# EAGLE board canSlaveV05a_nutzen (EAGLE 6.5.0), part 1 of 4
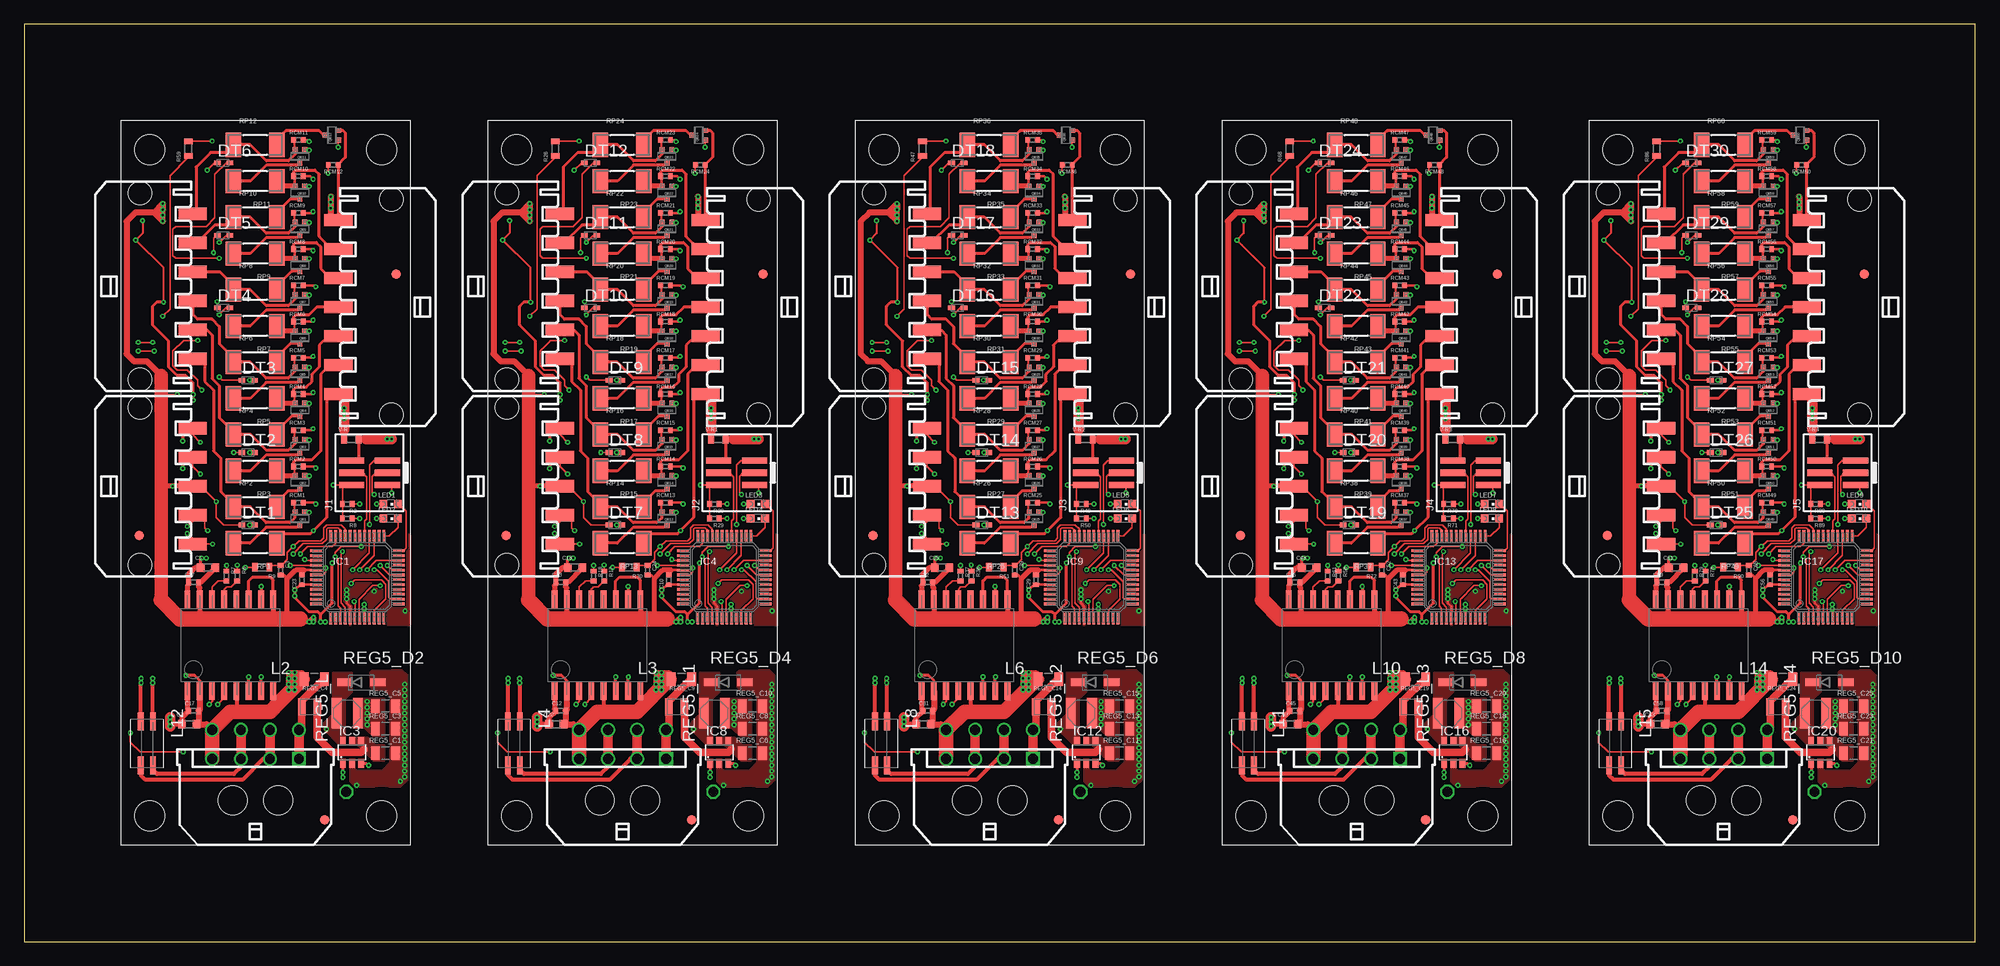
[diagram p0: board, top side]
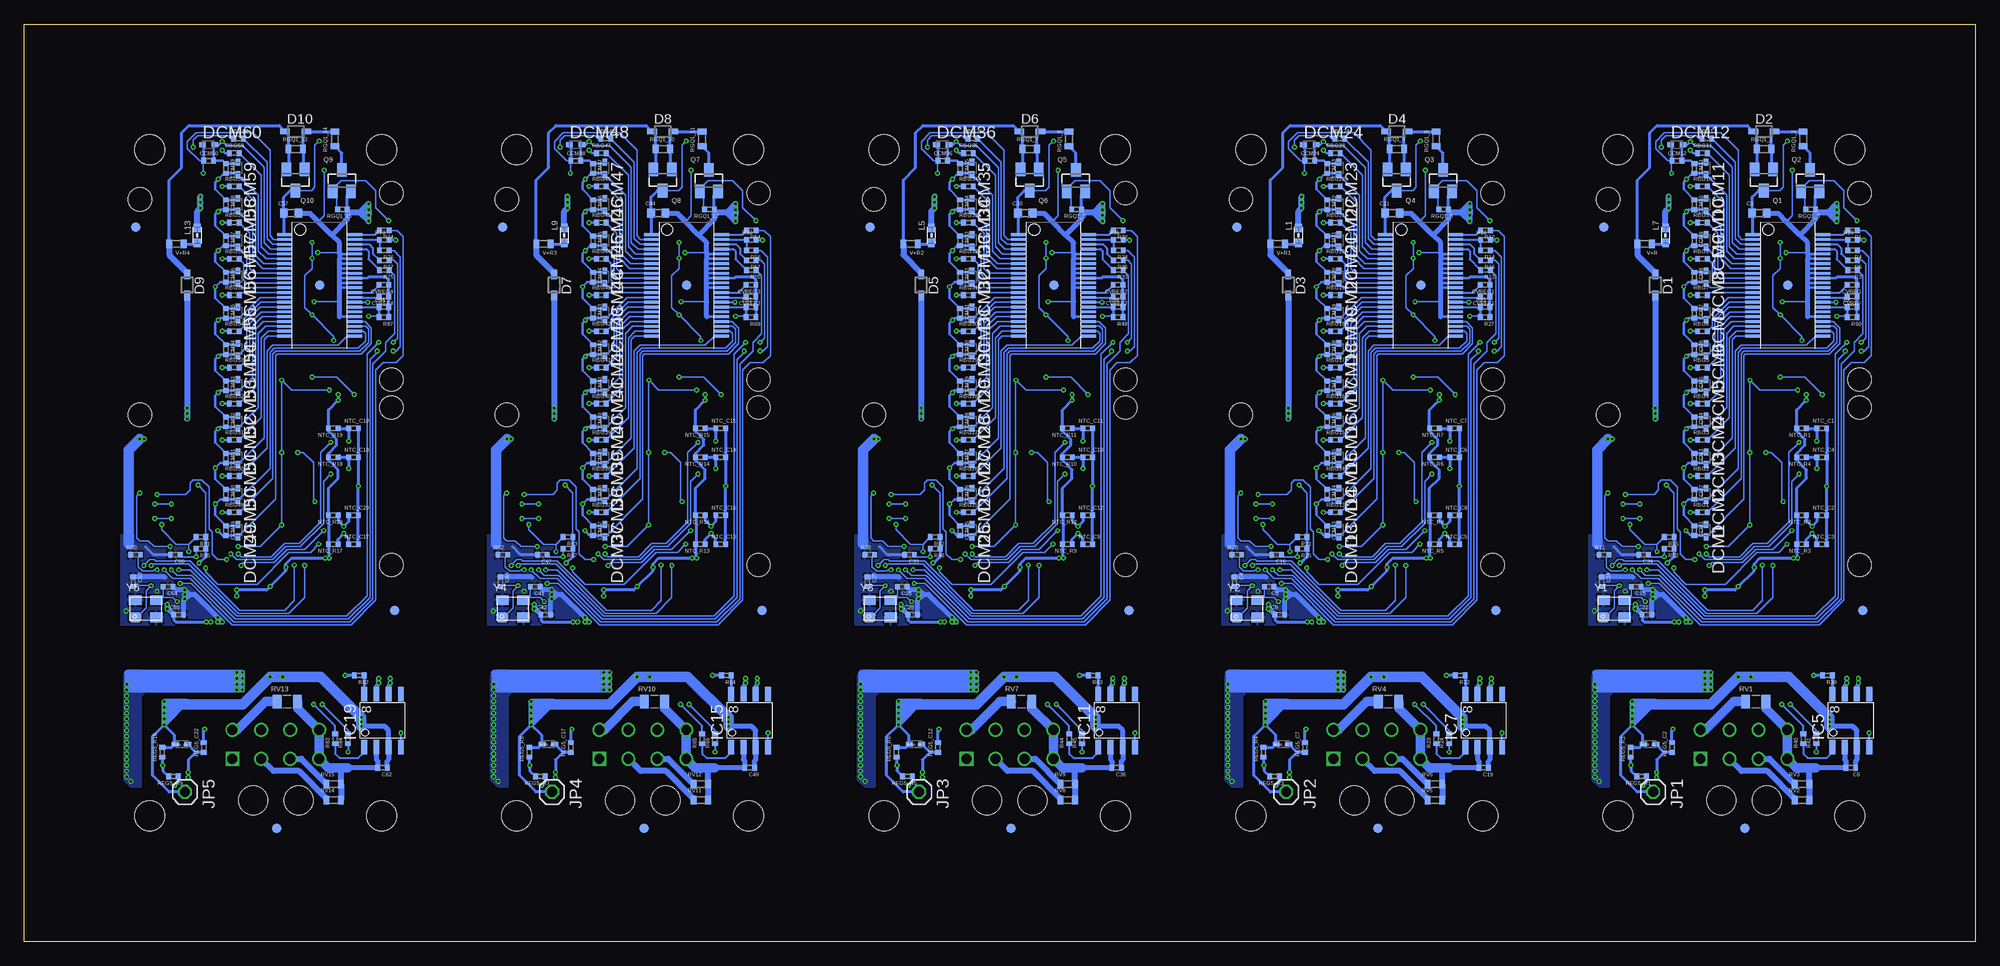
[diagram p1: board, bottom side, seen from below]

Size 202 x 95 mm. Coordinates in mm from the lower left corner, seen from the top.
Outline: 0,0 202,0 202,95 0,95 0,0
Copper layers (1*16): Top 0.035mm / dielectric 1.5mm / Bottom 0.035mm
Design rules "PCB-POOL Standard *": minimum track width 0.15mm, minimum drill 0.2mm, track to track 0.15mm, track to pad 0.15mm, pad to pad 0.15mm, via to via 0.15mm, smd to smd 0mil, copper to edge 0.3mm, drill to drill 0.2mm, minimum pad ring 0.2mm, minimum via ring 0.15mm, stop-mask expansion 0.075mm, vias tented up to drill 0.31mm, thermal gap 0.2mm
Holes 3.1 mm at 37,13 13,13 37,82 13,82 75,13 51,13 75,82 51,82 113,13 89,13 113,82 89,82 151,13 127,13 151,82 127,82 189,13 165,13 189,82 165,82
tRestrict: area 34,10 to 40,16; area 10,10 to 16,16; area 34,79 to 40,85; area 10,79 to 16,85; area 72,10 to 78,16; area 48,10 to 54,16; area 72,79 to 78,85; area 48,79 to 54,85; area 110,10 to 116,16; area 86,10 to 92,16; area 110,79 to 116,85; area 86,79 to 92,85; 8 more areas; 5 lines
bRestrict: area 34,10 to 40,16; area 10,10 to 16,16; area 34,79 to 40,85; area 10,79 to 16,85; area 72,10 to 78,16; area 48,10 to 54,16; area 72,79 to 78,85; area 48,79 to 54,85; area 110,10 to 116,16; area 86,10 to 92,16; area 110,79 to 116,85; area 86,79 to 92,85; 8 more areas; 5 lines

## Footprints (pad centres in the part's own frame; a part is rotated, then mirrored left to right if it is on the bottom)
C0603 = smd 0.8 x 0.9: 1 -0.75,0; 2 0.75,0
C0402 = smd 0.5 x 0.6: 1 -0.5,0; 2 0.5,0
SOD323-L = smd 1 x 0.6: A 1.1,0; C -1.1,0
SOD523 = smd 0.7 x 0.5: A 0.65,0; C -0.65,0
FIDUCIAL_1MM = smd 1 x 1: 1 0,0
LQFP48 = smd 0.28 x 1.2: 1 -2.75,-4.3; 2 -2.25,-4.3; 3 -1.75,-4.3; 4 -1.25,-4.3; 5 -0.75,-4.3; 6 -0.25,-4.3; 7 0.25,-4.3; 8 0.75,-4.3; 9 1.25,-4.3; 10 1.75,-4.3; 11 2.25,-4.3; 12 2.75,-4.3; 25 2.75,4.3; 26 2.25,4.3; 27 1.75,4.3; 28 1.25,4.3; 29 0.75,4.3; 30 0.25,4.3; 31 -0.25,4.3; 32 -0.75,4.3; 33 -1.25,4.3; 34 -1.75,4.3; 35 -2.25,4.3; 36 -2.75,4.3 | smd 1.2 x 0.28: 13 4.3,-2.75; 14 4.3,-2.25; 15 4.3,-1.75; 16 4.3,-1.25; 17 4.3,-0.75; 18 4.3,-0.25; 19 4.3,0.25; 20 4.3,0.75; 21 4.3,1.25; 22 4.3,1.75; 23 4.3,2.25; 24 4.3,2.75; 37 -4.3,2.75; 38 -4.3,2.25; 39 -4.3,1.75; 40 -4.3,1.25; 41 -4.3,0.75; 42 -4.3,0.25; 43 -4.3,-0.25; 44 -4.3,-0.75; 45 -4.3,-1.25; 46 -4.3,-1.75; 47 -4.3,-2.25; 48 -4.3,-2.75
44SSOP = smd 1.6 x 0.28: 1 -3.6,5.25; 2 -3.6,4.75; 3 -3.6,4.25; 4 -3.6,3.75; 5 -3.6,3.25; 6 -3.6,2.75; 7 -3.6,2.25; 8 -3.6,1.75; 9 -3.6,1.25; 10 -3.6,0.75; 11 -3.6,0.25; 12 -3.6,-0.25; 13 -3.6,-0.75; 14 -3.6,-1.25; 15 -3.6,-1.75; 16 -3.6,-2.25; 17 -3.6,-2.75; 18 -3.6,-3.25; 19 -3.6,-3.75; 20 -3.6,-4.25; 21 -3.6,-4.75; 22 -3.6,-5.25; 23 3.6,-5.25; 24 3.6,-4.75; 25 3.6,-4.25; 26 3.6,-3.75; 27 3.6,-3.25; 28 3.6,-2.75; 29 3.6,-2.25; 30 3.6,-1.75; 31 3.6,-1.25; 32 3.6,-0.75; 33 3.6,-0.25; 34 3.6,0.25; 35 3.6,0.75; 36 3.6,1.25; 37 3.6,1.75; 38 3.6,2.25; 39 3.6,2.75; 40 3.6,3.25; 41 3.6,3.75; 42 3.6,4.25; 43 3.6,4.75; 44 3.6,5.25
SOT23-6 = smd 0.6 x 0.9: 1 -0.95,-1.15; 2 0,-1.15; 3 0.95,-1.15; 4 0.95,1.15; 5 0,1.15; 6 -0.95,1.15
SO-8 = smd 1.524 x 0.61: 1 -2.743,1.905; 2 -2.743,0.635; 3 -2.743,-0.635; 4 -2.743,-1.905; 5 2.743,-1.905; 6 2.743,-0.635; 7 2.743,0.635; 8 2.743,1.905
2X03_1.27MM_SMT = smd 0.65 x 2.6: 1 -1.27,-1.85; 2 -1.27,1.85; 3 0,-1.85; 4 0,1.85; 5 1.27,-1.85; 6 1.27,1.85
1X01 = drill 1.016 octagon: 1 0,0
0603 = smd 0.85 x 0.7: 1 -0.775,0; 2 0.775,0
WE-PMI_0806 = smd 0.8 x 1.8: 1 -0.8,0; 2 0.8,0
WE-SLM = smd 1.85 x 0.6: 1 -2.28,0.63; 2 -2.28,-0.62; 3 2.27,-0.62; 4 2.27,0.63
CHIPLED_0603 = smd 0.8 x 0.8: A 0,-0.75; C 0,0.75
R0402 = smd 0.5 x 0.6: 1 -0.5,0; 2 0.5,0
SOT23 = smd 1 x 1.4: 1 -0.95,-1.1; 2 0.95,-1.1; 3 0,1.1
SOT416 = smd 0.5 x 0.6: 1 -0.5,-0.65; 2 0.5,-0.65; 3 0,0.65
R0603 = smd 0.6 x 0.9: 1 -0.75,0; 2 0.75,0
C0805 = smd 0.9 x 1.4: 1 -1.05,0; 2 1.05,0
SOD123 = smd 1.6 x 0.8: 1 -1.7,0; 2 1.7,0
WE-TPC_2828 = smd 3.2 x 1: 1 0,1.1; 2 0,-1.1
MINI_MELF-0207R = smd 1.6 x 2.5: 1 -2.25,0; 2 2.25,0
R0805 = smd 0.9 x 1.4: 1 -1.05,0; 2 1.05,0
SO16WB = smd 1.9 x 0.6: P$1 -4.7,4.445; P$2 -4.7,3.175; P$3 -4.7,1.905; P$4 -4.7,0.635; P$5 -4.7,-0.635; P$6 -4.7,-1.905; P$7 -4.7,-3.175; P$8 -4.7,-4.445; P$9 4.7,-4.445; P$10 4.7,-3.175; P$11 4.7,-1.905; P$12 4.7,-0.635; P$13 4.7,0.635; P$14 4.7,1.905; P$15 4.7,3.175; P$16 4.7,4.445
43650-0509 = smd 1.27 x 2.92: 1 6,5.48; 2 3,5.48; 3 0,5.48; 4 -3,5.48; 5 -6,5.48 | hole 2.41: 8.15,0; -8.15,0
43650-0709 = smd 1.27 x 2.92: 1 9,5.48; 2 6,5.48; 3 3,5.48; 4 0,5.48; 5 -3,5.48; 6 -6,5.48; 7 -9,5.48 | hole 2.41: 11.15,0; -11.15,0
43650-0609 = smd 1.27 x 2.92: 1 7.5,5.48; 2 4.5,5.48; 3 1.5,5.48; 4 -1.5,5.48; 5 -4.5,5.48; 6 -7.5,5.48 | hole 2.41: 9.65,0; -9.65,0
43045-0800 = drill 1.02 square: 1 4.5,4.32 | drill 1.02: 2 1.5,4.32; 3 -1.5,4.32; 4 -4.5,4.32; 5 4.5,7.32; 6 1.5,7.32; 7 -1.5,7.32; 8 -4.5,7.32 | hole 3: 2.35,0; -2.35,0
MT = smd 1.3 x 1: P1 -1.1,-0.9; P2 1.1,-0.9; P3 1.1,0.9; P4 -1.1,0.9

## Placement (x,y rotation side)
C1  100n,100V  [C0603]  22.36,75.42 0 bottom
C2  100n  [C0402]  12.75,65.7 0 bottom
C3  100n  [C0402]  26.55,38.45 270 top
C4  10p  [C0402]  76.7,37.25 270 bottom
C5  10u  [C0603]  19.02,38.73 0 top
C6  100n  [C0402]  12.9,18 180 bottom
C7  10u  [C0603]  17.1,22.5 0 top
C8  10p  [C0402]  73.1,36.75 180 bottom
C9  100n  [C0402]  72,33.85 0 bottom
C10  100n  [C0402]  66.75,37.45 90 top
C11  100n,100V  [C0603]  60.36,75.42 0 bottom
C12  100n  [C0402]  55.55,23.9 0 top
C13  100n  [C0402]  55.55,37.2 0 top
C14  10p  [C0402]  38.7,37.25 270 bottom
C15  10p  [C0402]  35.1,36.75 180 bottom
C16  100n  [C0402]  72.35,40.05 180 bottom
C17  100n  [C0402]  17.55,23.9 0 top
C18  10u  [C0603]  57.02,38.73 0 top
C19  100n  [C0402]  50.9,18 180 bottom
C20  10u  [C0603]  55.1,22.5 0 top
C21  100n  [C0402]  50.75,65.7 0 bottom
C22  100n  [C0402]  34,33.85 0 bottom
C23  100n  [C0402]  28.75,37.45 90 top
C24  100n  [C0402]  64.55,38.45 270 top
C25  10p  [C0402]  114.7,37.25 270 bottom
C26  10p  [C0402]  111.1,36.75 180 bottom
C27  100n  [C0402]  17.55,37.2 0 top
C28  100n  [C0402]  110,33.85 0 bottom
C29  100n  [C0402]  104.75,37.45 90 top
C30  100n,100V  [C0603]  98.36,75.42 0 bottom
C31  100n  [C0402]  93.55,23.9 0 top
C32  100n  [C0402]  93.55,37.2 0 top
C33  100n  [C0402]  110.35,40.05 180 bottom
C34  100n  [C0402]  34.35,40.05 180 bottom
C35  10u  [C0603]  95.03,38.73 0 top
C36  100n  [C0402]  88.9,18 180 bottom
C37  10u  [C0603]  93.1,22.5 0 top
C38  100n  [C0402]  88.75,65.7 0 bottom
C39  100n  [C0402]  102.55,38.45 270 top
C40  10p  [C0402]  152.7,37.25 270 bottom
C41  10p  [C0402]  149.1,36.75 180 bottom
C42  100n  [C0402]  148,33.85 0 bottom
C43  100n  [C0402]  142.75,37.45 90 top
C44  100n,100V  [C0603]  136.36,75.42 0 bottom
C45  100n  [C0402]  131.55,23.9 0 top
C46  100n  [C0402]  131.55,37.2 0 top
C47  100n  [C0402]  148.35,40.05 180 bottom
C48  10u  [C0603]  133.03,38.73 0 top
C49  100n  [C0402]  126.9,18 180 bottom
C50  10u  [C0603]  131.1,22.5 0 top
C51  100n  [C0402]  126.75,65.7 0 bottom
C52  100n  [C0402]  140.55,38.45 270 top
C53  10p  [C0402]  190.7,37.25 270 bottom
C54  10p  [C0402]  187.1,36.75 180 bottom
C55  100n  [C0402]  186,33.85 0 bottom
C56  100n  [C0402]  180.75,37.45 90 top
C57  100n,100V  [C0603]  174.36,75.42 0 bottom
C58  100n  [C0402]  169.55,23.9 0 top
C59  100n  [C0402]  169.55,37.2 0 top
C60  100n  [C0402]  186.35,40.05 180 bottom
C61  10u  [C0603]  171.03,38.73 0 top
C62  100n  [C0402]  164.9,18 180 bottom
C63  10u  [C0603]  169.1,22.5 0 top
C64  100n  [C0402]  164.75,65.7 0 bottom
C65  100n  [C0402]  178.55,38.45 270 top
CCM1  100n  [C0402]  29.1,42.55 270 bottom
CCM2  100n  [C0402]  29.1,46.3 270 bottom
CCM3  100n  [C0402]  29.1,50.05 270 bottom
CCM4  100n  [C0402]  29.1,53.8 270 bottom
CCM5  100n  [C0402]  29.1,57.55 270 bottom
CCM6  100n  [C0402]  29.1,61.3 270 bottom
CCM7  100n  [C0402]  29.1,65.05 270 bottom
CCM8  100n  [C0402]  29.1,68.8 270 bottom
CCM9  100n  [C0402]  29.1,72.55 270 bottom
CCM10  100n  [C0402]  29.1,76.3 270 bottom
CCM11  100n  [C0402]  29.1,80.05 270 bottom
CCM12  100n  [C0402]  30.9,80.85 0 bottom
CCM13  100n  [C0402]  67.1,42.55 270 bottom
CCM14  100n  [C0402]  67.1,46.3 270 bottom
CCM15  100n  [C0402]  67.1,50.05 270 bottom
CCM16  100n  [C0402]  67.1,53.8 270 bottom
CCM17  100n  [C0402]  67.1,57.55 270 bottom
CCM18  100n  [C0402]  67.1,61.3 270 bottom
CCM19  100n  [C0402]  67.1,65.05 270 bottom
CCM20  100n  [C0402]  67.1,68.8 270 bottom
CCM21  100n  [C0402]  67.1,72.55 270 bottom
CCM22  100n  [C0402]  67.1,76.3 270 bottom
CCM23  100n  [C0402]  67.1,80.05 270 bottom
CCM24  100n  [C0402]  68.9,80.85 0 bottom
CCM25  100n  [C0402]  105.1,42.55 270 bottom
CCM26  100n  [C0402]  105.1,46.3 270 bottom
CCM27  100n  [C0402]  105.1,50.05 270 bottom
CCM28  100n  [C0402]  105.1,53.8 270 bottom
CCM29  100n  [C0402]  105.1,57.55 270 bottom
CCM30  100n  [C0402]  105.1,61.3 270 bottom
CCM31  100n  [C0402]  105.1,65.05 270 bottom
CCM32  100n  [C0402]  105.1,68.8 270 bottom
CCM33  100n  [C0402]  105.1,72.55 270 bottom
CCM34  100n  [C0402]  105.1,76.3 270 bottom
CCM35  100n  [C0402]  105.1,80.05 270 bottom
CCM36  100n  [C0402]  106.9,80.85 0 bottom
CCM37  100n  [C0402]  143.1,42.55 270 bottom
CCM38  100n  [C0402]  143.1,46.3 270 bottom
CCM39  100n  [C0402]  143.1,50.05 270 bottom
CCM40  100n  [C0402]  143.1,53.8 270 bottom
CCM41  100n  [C0402]  143.1,57.55 270 bottom
CCM42  100n  [C0402]  143.1,61.3 270 bottom
CCM43  100n  [C0402]  143.1,65.05 270 bottom
CCM44  100n  [C0402]  143.1,68.8 270 bottom
CCM45  100n  [C0402]  143.1,72.55 270 bottom
CCM46  100n  [C0402]  143.1,76.3 270 bottom
CCM47  100n  [C0402]  143.1,80.05 270 bottom
CCM48  100n  [C0402]  144.9,80.85 0 bottom
CCM49  100n  [C0402]  181.1,42.55 270 bottom
CCM50  100n  [C0402]  181.1,46.3 270 bottom
CCM51  100n  [C0402]  181.1,50.05 270 bottom
CCM52  100n  [C0402]  181.1,53.8 270 bottom
CCM53  100n  [C0402]  181.1,57.55 270 bottom
CCM54  100n  [C0402]  181.1,61.3 270 bottom
CCM55  100n  [C0402]  181.1,65.05 270 bottom
CCM56  100n  [C0402]  181.1,68.8 270 bottom
CCM57  100n  [C0402]  181.1,72.55 270 bottom
CCM58  100n  [C0402]  181.1,76.3 270 bottom
CCM59  100n  [C0402]  181.1,80.05 270 bottom
CCM60  100n  [C0402]  182.9,80.85 0 bottom
CVREF  1u  [C0402]  12.75,66.8 180 bottom
CVREF1  1u  [C0402]  50.75,66.8 180 bottom
CVREF2  1u  [C0402]  88.75,66.8 180 bottom
CVREF3  1u  [C0402]  126.75,66.8 180 bottom
CVREF4  1u  [C0402]  164.75,66.8 180 bottom
CVREG  1u  [C0402]  12.75,68 180 bottom
CVREG1  1u  [C0402]  50.75,68 180 bottom
CVREG2  1u  [C0402]  88.75,68 180 bottom
CVREG3  1u  [C0402]  126.75,68 180 bottom
CVREG4  1u  [C0402]  164.75,68 180 bottom
D1  51V  [SOD323-L]  33.13,67.99 270 bottom
D2  12V  [SOD323-L]  21.89,83.89 0 bottom
D3  51V  [SOD323-L]  71.13,67.99 270 bottom
D4  12V  [SOD323-L]  59.89,83.89 0 bottom
D5  51V  [SOD323-L]  109.13,67.99 270 bottom
D6  12V  [SOD323-L]  97.89,83.89 0 bottom
D7  51V  [SOD323-L]  147.13,67.99 270 bottom
D8  12V  [SOD323-L]  135.89,83.89 0 bottom
D9  51V  [SOD323-L]  185.13,67.99 270 bottom
D10  12V  [SOD323-L]  173.89,83.89 0 bottom
DCM1  7.5  [SOD523]  27.88,42.55 270 bottom
DCM2  7.5  [SOD523]  27.88,46.3 270 bottom
DCM3  7.5  [SOD523]  27.88,50.05 270 bottom
DCM4  7.5  [SOD523]  27.88,53.8 270 bottom
DCM5  7.5  [SOD523]  27.88,57.55 270 bottom
DCM6  7.5  [SOD523]  27.88,61.3 270 bottom
DCM7  7.5  [SOD523]  27.88,65.05 270 bottom
DCM8  7.5  [SOD523]  27.88,68.8 270 bottom
DCM9  7.5  [SOD523]  27.88,72.55 270 bottom
DCM10  7.5  [SOD523]  27.88,76.3 270 bottom
DCM11  7.5  [SOD523]  27.88,80.05 270 bottom
DCM12  7.5  [SOD523]  30.9,82.53 0 bottom
DCM13  7.5  [SOD523]  65.88,42.55 270 bottom
DCM14  7.5  [SOD523]  65.88,46.3 270 bottom
DCM15  7.5  [SOD523]  65.88,50.05 270 bottom
DCM16  7.5  [SOD523]  65.88,53.8 270 bottom
DCM17  7.5  [SOD523]  65.88,57.55 270 bottom
DCM18  7.5  [SOD523]  65.88,61.3 270 bottom
DCM19  7.5  [SOD523]  65.88,65.05 270 bottom
DCM20  7.5  [SOD523]  65.88,68.8 270 bottom
DCM21  7.5  [SOD523]  65.88,72.55 270 bottom
DCM22  7.5  [SOD523]  65.88,76.3 270 bottom
DCM23  7.5  [SOD523]  65.88,80.05 270 bottom
DCM24  7.5  [SOD523]  68.9,82.53 0 bottom
DCM25  7.5  [SOD523]  103.88,42.55 270 bottom
DCM26  7.5  [SOD523]  103.88,46.3 270 bottom
DCM27  7.5  [SOD523]  103.88,50.05 270 bottom
DCM28  7.5  [SOD523]  103.88,53.8 270 bottom
DCM29  7.5  [SOD523]  103.88,57.55 270 bottom
DCM30  7.5  [SOD523]  103.88,61.3 270 bottom
DCM31  7.5  [SOD523]  103.88,65.05 270 bottom
DCM32  7.5  [SOD523]  103.88,68.8 270 bottom
DCM33  7.5  [SOD523]  103.88,72.55 270 bottom
DCM34  7.5  [SOD523]  103.88,76.3 270 bottom
DCM35  7.5  [SOD523]  103.88,80.05 270 bottom
DCM36  7.5  [SOD523]  106.9,82.53 0 bottom
DCM37  7.5  [SOD523]  141.88,42.55 270 bottom
DCM38  7.5  [SOD523]  141.88,46.3 270 bottom
DCM39  7.5  [SOD523]  141.88,50.05 270 bottom
DCM40  7.5  [SOD523]  141.88,53.8 270 bottom
DCM41  7.5  [SOD523]  141.88,57.55 270 bottom
DCM42  7.5  [SOD523]  141.88,61.3 270 bottom
DCM43  7.5  [SOD523]  141.88,65.05 270 bottom
DCM44  7.5  [SOD523]  141.88,68.8 270 bottom
DCM45  7.5  [SOD523]  141.88,72.55 270 bottom
DCM46  7.5  [SOD523]  141.88,76.3 270 bottom
DCM47  7.5  [SOD523]  141.88,80.05 270 bottom
DCM48  7.5  [SOD523]  144.9,82.53 0 bottom
DCM49  7.5  [SOD523]  179.88,42.55 270 bottom
DCM50  7.5  [SOD523]  179.88,46.3 270 bottom
DCM51  7.5  [SOD523]  179.88,50.05 270 bottom
DCM52  7.5  [SOD523]  179.88,53.8 270 bottom
DCM53  7.5  [SOD523]  179.88,57.55 270 bottom
DCM54  7.5  [SOD523]  179.88,61.3 270 bottom
DCM55  7.5  [SOD523]  179.88,65.05 270 bottom
DCM56  7.5  [SOD523]  179.88,68.8 270 bottom
DCM57  7.5  [SOD523]  179.88,72.55 270 bottom
DCM58  7.5  [SOD523]  179.88,76.3 270 bottom
DCM59  7.5  [SOD523]  179.88,80.05 270 bottom
DCM60  7.5  [SOD523]  182.9,82.53 0 bottom
DT1  1PS79SB40  [SOD523]  23.2,43.12 0 top
DT2  1PS79SB40  [SOD523]  23.2,50.65 0 top
DT3  1PS79SB40  [SOD523]  23.2,58.12 0 top
DT4  1PS79SB40  [SOD523]  20.65,65.62 0 top
DT5  1PS79SB40  [SOD523]  20.65,73.12 0 top
DT6  1PS79SB40  [SOD523]  20.65,80.62 0 top
DT7  1PS79SB40  [SOD523]  61.2,43.12 0 top
DT8  1PS79SB40  [SOD523]  61.2,50.65 0 top
DT9  1PS79SB40  [SOD523]  61.2,58.12 0 top
DT10  1PS79SB40  [SOD523]  58.65,65.62 0 top
DT11  1PS79SB40  [SOD523]  58.65,73.12 0 top
DT12  1PS79SB40  [SOD523]  58.65,80.62 0 top
DT13  1PS79SB40  [SOD523]  99.2,43.12 0 top
DT14  1PS79SB40  [SOD523]  99.2,50.65 0 top
DT15  1PS79SB40  [SOD523]  99.2,58.12 0 top
DT16  1PS79SB40  [SOD523]  96.65,65.62 0 top
DT17  1PS79SB40  [SOD523]  96.65,73.12 0 top
DT18  1PS79SB40  [SOD523]  96.65,80.62 0 top
DT19  1PS79SB40  [SOD523]  137.2,43.12 0 top
DT20  1PS79SB40  [SOD523]  137.2,50.65 0 top
DT21  1PS79SB40  [SOD523]  137.2,58.12 0 top
DT22  1PS79SB40  [SOD523]  134.65,65.62 0 top
DT23  1PS79SB40  [SOD523]  134.65,73.12 0 top
DT24  1PS79SB40  [SOD523]  134.65,80.62 0 top
DT25  1PS79SB40  [SOD523]  175.2,43.12 0 top
DT26  1PS79SB40  [SOD523]  175.2,50.65 0 top
DT27  1PS79SB40  [SOD523]  175.2,58.12 0 top
DT28  1PS79SB40  [SOD523]  172.65,65.62 0 top
DT29  1PS79SB40  [SOD523]  172.65,73.12 0 top
DT30  1PS79SB40  [SOD523]  172.65,80.62 0 top
FID1  FIDUCIAL""  [FIDUCIAL_1MM]  69.09,12.58 90 top
FID2  FIDUCIAL""  [FIDUCIAL_1MM]  31.09,12.58 90 top
FID3  FIDUCIAL""  [FIDUCIAL_1MM]  38.52,69.12 90 top
FID4  FIDUCIAL""  [FIDUCIAL_1MM]  11.9,42.05 90 top
FID5  FIDUCIAL""  [FIDUCIAL_1MM]  76.52,69.12 90 top
FID6  FIDUCIAL""  [FIDUCIAL_1MM]  49.63,34.28 270 bottom
FID7  FIDUCIAL""  [FIDUCIAL_1MM]  11.63,34.28 270 bottom
FID8  FIDUCIAL""  [FIDUCIAL_1MM]  23.84,11.72 270 bottom
FID9  FIDUCIAL""  [FIDUCIAL_1MM]  19.4,68 270 bottom
FID10  FIDUCIAL""  [FIDUCIAL_1MM]  38.45,74 270 bottom
FID11  FIDUCIAL""  [FIDUCIAL_1MM]  61.84,11.72 270 bottom
FID12  FIDUCIAL""  [FIDUCIAL_1MM]  49.9,42.05 90 top
FID13  FIDUCIAL""  [FIDUCIAL_1MM]  57.4,68 270 bottom
FID14  FIDUCIAL""  [FIDUCIAL_1MM]  76.45,74 270 bottom
FID15  FIDUCIAL""  [FIDUCIAL_1MM]  107.09,12.58 90 top
FID16  FIDUCIAL""  [FIDUCIAL_1MM]  114.52,69.12 90 top
FID17  FIDUCIAL""  [FIDUCIAL_1MM]  87.63,34.28 270 bottom
FID18  FIDUCIAL""  [FIDUCIAL_1MM]  99.84,11.72 270 bottom
FID19  FIDUCIAL""  [FIDUCIAL_1MM]  87.9,42.05 90 top
FID20  FIDUCIAL""  [FIDUCIAL_1MM]  95.4,68 270 bottom
FID21  FIDUCIAL""  [FIDUCIAL_1MM]  114.45,74 270 bottom
FID22  FIDUCIAL""  [FIDUCIAL_1MM]  145.09,12.58 90 top
FID23  FIDUCIAL""  [FIDUCIAL_1MM]  152.51,69.12 90 top
FID24  FIDUCIAL""  [FIDUCIAL_1MM]  125.63,34.28 270 bottom
FID25  FIDUCIAL""  [FIDUCIAL_1MM]  137.84,11.72 270 bottom
FID26  FIDUCIAL""  [FIDUCIAL_1MM]  125.9,42.05 90 top
FID27  FIDUCIAL""  [FIDUCIAL_1MM]  133.4,68 270 bottom
FID28  FIDUCIAL""  [FIDUCIAL_1MM]  152.45,74 270 bottom
FID29  FIDUCIAL""  [FIDUCIAL_1MM]  183.09,12.58 90 top
FID30  FIDUCIAL""  [FIDUCIAL_1MM]  190.51,69.12 90 top
FID31  FIDUCIAL""  [FIDUCIAL_1MM]  163.63,34.28 270 bottom
FID32  FIDUCIAL""  [FIDUCIAL_1MM]  175.84,11.72 270 bottom
FID33  FIDUCIAL""  [FIDUCIAL_1MM]  163.9,42.05 90 top
FID34  FIDUCIAL""  [FIDUCIAL_1MM]  171.4,68 270 bottom
FID35  FIDUCIAL""  [FIDUCIAL_1MM]  190.45,74 270 bottom
IC1  LPC11C14  [LQFP48]  34.49,37.71 0 top
IC2  LTC6803-4  [44SSOP]  19.43,67.96 0 bottom
IC3  LT1616  [SOT23-6]  33.95,19.6 0 top
IC4  LPC11C14  [LQFP48]  72.49,37.71 0 top
IC5  PCA82C251  [SO-8]  12.9,22.89 90 bottom
IC6  LTC6803-4  [44SSOP]  57.43,67.96 0 bottom
IC7  PCA82C251  [SO-8]  50.9,22.89 90 bottom
IC8  LT1616  [SOT23-6]  71.95,19.6 0 top
IC9  LPC11C14  [LQFP48]  110.49,37.71 0 top
IC10  LTC6803-4  [44SSOP]  95.43,67.96 0 bottom
IC11  PCA82C251  [SO-8]  88.9,22.89 90 bottom
IC12  LT1616  [SOT23-6]  109.95,19.6 0 top
IC13  LPC11C14  [LQFP48]  148.49,37.71 0 top
IC14  LTC6803-4  [44SSOP]  133.43,67.96 0 bottom
IC15  PCA82C251  [SO-8]  126.9,22.89 90 bottom
IC16  LT1616  [SOT23-6]  147.95,19.6 0 top
IC17  LPC11C14  [LQFP48]  186.49,37.71 0 top
IC18  LTC6803-4  [44SSOP]  171.43,67.96 0 bottom
IC19  PCA82C251  [SO-8]  164.9,22.89 90 bottom
IC20  LT1616  [SOT23-6]  185.95,19.6 0 top
J1  PINHEAD-2X031.27SMT  [2X03_1.27MM_SMT]  35.75,48.55 90 top
J2  PINHEAD-2X031.27SMT  [2X03_1.27MM_SMT]  73.75,48.55 90 top
J3  PINHEAD-2X031.27SMT  [2X03_1.27MM_SMT]  111.75,48.55 90 top
J4  PINHEAD-2X031.27SMT  [2X03_1.27MM_SMT]  149.75,48.55 90 top
J5  PINHEAD-2X031.27SMT  [2X03_1.27MM_SMT]  187.75,48.55 90 top
JP1  [1X01]  33.35,15.5 270 bottom
JP2  [1X01]  71.35,15.5 270 bottom
JP3  [1X01]  109.35,15.5 270 bottom
JP4  [1X01]  147.35,15.5 270 bottom
JP5  [1X01]  185.35,15.5 270 bottom
L1  WE-CBF,742792664  [0603]  70.08,73.13 270 bottom
L2  WE-PMI/74479776233A  [WE-PMI_0806]  29.55,24.3 0 top
L3  WE-PMI/74479776233A  [WE-PMI_0806]  67.55,24.3 0 top
L4  WE-SLM  [WE-SLM]  50.7,20.5 270 top
L5  WE-CBF,742792664  [0603]  108.08,73.13 270 bottom
L6  WE-PMI/74479776233A  [WE-PMI_0806]  105.55,24.3 0 top
L7  WE-CBF,742792664  [0603]  32.08,73.13 270 bottom
L8  WE-SLM  [WE-SLM]  88.7,20.5 270 top
L9  WE-CBF,742792664  [0603]  146.08,73.13 270 bottom
L10  WE-PMI/74479776233A  [WE-PMI_0806]  143.55,24.3 0 top
L11  WE-SLM  [WE-SLM]  126.7,20.5 270 top
L12  WE-SLM  [WE-SLM]  12.7,20.5 270 top
L13  WE-CBF,742792664  [0603]  184.08,73.13 270 bottom
L14  WE-PMI/74479776233A  [WE-PMI_0806]  181.55,24.3 0 top
L15  WE-SLM  [WE-SLM]  164.7,20.5 270 top
LED1  GRN  [CHIPLED_0603]  37.95,45.3 270 top
LED2  RED  [CHIPLED_0603]  37.95,43.8 270 top
LED3  GRN  [CHIPLED_0603]  75.95,45.3 270 top
LED4  RED  [CHIPLED_0603]  75.95,43.8 270 top
LED5  GRN  [CHIPLED_0603]  113.95,45.3 270 top
LED6  RED  [CHIPLED_0603]  113.95,43.8 270 top
LED7  GRN  [CHIPLED_0603]  151.95,45.3 270 top
LED8  RED  [CHIPLED_0603]  151.95,43.8 270 top
LED9  GRN  [CHIPLED_0603]  189.95,45.3 270 top
LED10  RED  [CHIPLED_0603]  189.95,43.8 270 top
NTC_C1  1u  [C0402]  15.9,53.15 0 bottom
NTC_C2  1u  [C0402]  15.9,44.15 0 bottom
NTC_C3  1u  [C0402]  15.9,41.15 0 bottom
NTC_C4  1u  [C0402]  15.9,50.15 0 bottom
NTC_C5  1u  [C0402]  53.9,41.15 0 bottom
NTC_C6  1u  [C0402]  53.9,50.15 0 bottom
NTC_C7  1u  [C0402]  53.9,53.15 0 bottom
NTC_C8  1u  [C0402]  53.9,44.15 0 bottom
NTC_C9  1u  [C0402]  91.9,41.15 0 bottom
NTC_C10  1u  [C0402]  91.9,50.15 0 bottom
NTC_C11  1u  [C0402]  91.9,53.15 0 bottom
NTC_C12  1u  [C0402]  91.9,44.15 0 bottom
NTC_C13  1u  [C0402]  129.9,41.15 0 bottom
NTC_C14  1u  [C0402]  129.9,50.15 0 bottom
NTC_C15  1u  [C0402]  129.9,53.15 0 bottom
NTC_C16  1u  [C0402]  129.9,44.15 0 bottom
NTC_C17  1u  [C0402]  167.9,41.15 0 bottom
NTC_C18  1u  [C0402]  167.9,50.15 0 bottom
NTC_C19  1u  [C0402]  167.9,53.15 0 bottom
NTC_C20  1u  [C0402]  167.9,44.15 0 bottom
NTC_R1  1k  [R0402]  18,53.15 180 bottom
NTC_R2  1k  [R0402]  18,44.15 180 bottom
NTC_R3  1k  [R0402]  18,41.15 180 bottom
NTC_R4  1k  [R0402]  18,50.15 180 bottom
NTC_R5  1k  [R0402]  56,41.15 180 bottom
NTC_R6  1k  [R0402]  56,50.15 180 bottom
NTC_R7  1k  [R0402]  56,53.15 180 bottom
NTC_R8  1k  [R0402]  56,44.15 180 bottom
NTC_R9  1k  [R0402]  94,41.15 180 bottom
NTC_R10  1k  [R0402]  94,50.15 180 bottom
NTC_R11  1k  [R0402]  94,53.15 180 bottom
NTC_R12  1k  [R0402]  94,44.15 180 bottom
NTC_R13  1k  [R0402]  132,41.15 180 bottom
NTC_R14  1k  [R0402]  132,50.15 180 bottom
NTC_R15  1k  [R0402]  132,53.15 180 bottom
NTC_R16  1k  [R0402]  132,44.15 180 bottom
NTC_R17  1k  [R0402]  170,41.15 180 bottom
NTC_R18  1k  [R0402]  170,50.15 180 bottom
NTC_R19  1k  [R0402]  170,53.15 180 bottom
NTC_R20  1k  [R0402]  170,44.15 180 bottom
Q1  BSS84  [SOT23]  21.9,78.86 180 bottom
Q2  2N7002  [SOT23]  17.11,78.78 0 bottom
Q3  2N7002  [SOT23]  55.11,78.78 0 bottom
Q4  BSS84  [SOT23]  59.9,78.86 180 bottom
Q5  2N7002  [SOT23]  93.11,78.78 0 bottom
Q6  BSS84  [SOT23]  97.9,78.86 180 bottom
Q7  2N7002  [SOT23]  131.11,78.78 0 bottom
Q8  BSS84  [SOT23]  135.9,78.86 180 bottom
Q9  2N7002  [SOT23]  169.11,78.78 0 bottom
Q10  BSS84  [SOT23]  173.9,78.86 180 bottom
QB1  BSS84AKT  [SOT416]  28.55,43.8 180 top
QB2  BSS84AKT  [SOT416]  28.55,47.55 180 top
QB3  BSS84AKT  [SOT416]  28.55,51.3 180 top
QB4  BSS84AKT  [SOT416]  28.55,55.05 180 top
QB5  BSS84AKT  [SOT416]  28.55,58.8 180 top
QB6  BSS84AKT  [SOT416]  28.55,62.55 180 top
QB7  BSS84AKT  [SOT416]  28.55,66.3 180 top
QB8  BSS84AKT  [SOT416]  28.55,70.05 180 top
QB9  BSS84AKT  [SOT416]  28.55,73.8 180 top
QB10  BSS84AKT  [SOT416]  28.55,77.55 180 top
QB11  BSS84AKT  [SOT416]  28.55,81.3 180 top
QB12  BSS84AKT  [SOT416]  31.85,83.5 90 top
QB13  BSS84AKT  [SOT416]  66.55,43.8 180 top
QB14  BSS84AKT  [SOT416]  66.55,47.55 180 top
QB15  BSS84AKT  [SOT416]  66.55,51.3 180 top
QB16  BSS84AKT  [SOT416]  66.55,55.05 180 top
QB17  BSS84AKT  [SOT416]  66.55,58.8 180 top
QB18  BSS84AKT  [SOT416]  66.55,62.55 180 top
QB19  BSS84AKT  [SOT416]  66.55,66.3 180 top
QB20  BSS84AKT  [SOT416]  66.55,70.05 180 top
QB21  BSS84AKT  [SOT416]  66.55,73.8 180 top
QB22  BSS84AKT  [SOT416]  66.55,77.55 180 top
QB23  BSS84AKT  [SOT416]  66.55,81.3 180 top
QB24  BSS84AKT  [SOT416]  69.85,83.5 90 top
QB25  BSS84AKT  [SOT416]  104.55,43.8 180 top
QB26  BSS84AKT  [SOT416]  104.55,47.55 180 top
QB27  BSS84AKT  [SOT416]  104.55,51.3 180 top
QB28  BSS84AKT  [SOT416]  104.55,55.05 180 top
QB29  BSS84AKT  [SOT416]  104.55,58.8 180 top
QB30  BSS84AKT  [SOT416]  104.55,62.55 180 top
QB31  BSS84AKT  [SOT416]  104.55,66.3 180 top
QB32  BSS84AKT  [SOT416]  104.55,70.05 180 top
QB33  BSS84AKT  [SOT416]  104.55,73.8 180 top
QB34  BSS84AKT  [SOT416]  104.55,77.55 180 top
QB35  BSS84AKT  [SOT416]  104.55,81.3 180 top
QB36  BSS84AKT  [SOT416]  107.85,83.5 90 top
QB37  BSS84AKT  [SOT416]  142.55,43.8 180 top
QB38  BSS84AKT  [SOT416]  142.55,47.55 180 top
QB39  BSS84AKT  [SOT416]  142.55,51.3 180 top
QB40  BSS84AKT  [SOT416]  142.55,55.05 180 top
QB41  BSS84AKT  [SOT416]  142.55,58.8 180 top
QB42  BSS84AKT  [SOT416]  142.55,62.55 180 top
QB43  BSS84AKT  [SOT416]  142.55,66.3 180 top
QB44  BSS84AKT  [SOT416]  142.55,70.05 180 top
QB45  BSS84AKT  [SOT416]  142.55,73.8 180 top
QB46  BSS84AKT  [SOT416]  142.55,77.55 180 top
QB47  BSS84AKT  [SOT416]  142.55,81.3 180 top
QB48  BSS84AKT  [SOT416]  145.85,83.5 90 top
QB49  BSS84AKT  [SOT416]  180.55,43.8 180 top
QB50  BSS84AKT  [SOT416]  180.55,47.55 180 top
QB51  BSS84AKT  [SOT416]  180.55,51.3 180 top
QB52  BSS84AKT  [SOT416]  180.55,55.05 180 top
QB53  BSS84AKT  [SOT416]  180.55,58.8 180 top
QB54  BSS84AKT  [SOT416]  180.55,62.55 180 top
QB55  BSS84AKT  [SOT416]  180.55,66.3 180 top
QB56  BSS84AKT  [SOT416]  180.55,70.05 180 top
QB57  BSS84AKT  [SOT416]  180.55,73.8 180 top
QB58  BSS84AKT  [SOT416]  180.55,77.55 180 top
QB59  BSS84AKT  [SOT416]  180.55,81.3 180 top
QB60  BSS84AKT  [SOT416]  183.85,83.5 90 top
R1  100  [R0402]  12.72,73.64 180 bottom
R2  1k  [R0402]  33.45,45.3 180 top
R3  100  [R0402]  12.72,69.53 180 bottom
R4  100  [R0402]  12.72,71.57 180 bottom
R5  100  [R0402]  12.72,70.55 180 bottom
R6  100  [R0402]  22.07,37.85 270 top
R7  100  [R0402]  20.95,37.85 270 top
R8  1k  [R0402]  33.45,43.8 180 top
R9  3.3k  [R0603]  24.65,38.75 180 top
R10  4.7k  [R0402]  50.72,72.65 0 bottom
R11  10k  [R0402]  38.45,40.05 0 bottom
R12  100  [R0402]  50.72,73.64 180 bottom
R13  100  [R0402]  50.72,69.53 180 bottom
R14  100  [R0402]  50.72,71.57 180 bottom
R15  10k  [R0402]  31.7,41.89 180 bottom
R16  100  [R0402]  50.72,70.55 180 bottom
R17  100  [R0402]  60.06,37.85 270 top
R18  100  [R0402]  58.95,37.85 270 top
R19  4.7k  [R0402]  12.72,72.65 0 bottom
R20  10k  [R0402]  76.45,40.05 0 bottom
R21  10k  [R0402]  69.7,41.89 180 bottom
R22  0  [R0402]  53.31,27.55 180 bottom
R23  100  [R0402]  55.81,20.99 90 bottom
R24  100  [R0402]  54.48,20.99 90 bottom
R25  10k  [R0402]  69.7,40.67 180 bottom
R26  332k0.1%  [R0603]  55,82.1 90 top
R27  20k0.1%  [R0402]  50.75,64.65 180 bottom
R28  1k  [R0402]  71.45,45.3 180 top
R29  1k  [R0402]  71.45,43.8 180 top
R30  3.3k  [R0603]  62.65,38.75 180 top
R31  4.7k  [R0402]  88.72,72.65 0 bottom
R32  100  [R0402]  88.72,73.64 180 bottom
R33  100  [R0402]  88.72,69.53 180 bottom
R34  100  [R0402]  88.72,71.57 180 bottom
R35  100  [R0402]  88.72,70.55 180 bottom
R36  100  [R0402]  98.06,37.85 270 top
R37  100  [R0402]  96.95,37.85 270 top
R38  10k  [R0402]  114.45,40.05 0 bottom
R39  0  [R0402]  15.31,27.55 180 bottom
R40  100  [R0402]  17.81,20.99 90 bottom
R41  100  [R0402]  16.48,20.99 90 bottom
R42  10k  [R0402]  107.7,41.89 180 bottom
R43  0  [R0402]  91.31,27.55 180 bottom
R44  100  [R0402]  93.81,20.99 90 bottom
R45  100  [R0402]  92.48,20.99 90 bottom
R46  10k  [R0402]  107.7,40.67 180 bottom
R47  332k0.1%  [R0603]  93,82.1 90 top
R48  20k0.1%  [R0402]  88.75,64.65 180 bottom
R49  1k  [R0402]  109.45,45.3 180 top
R50  1k  [R0402]  109.45,43.8 180 top
R51  3.3k  [R0603]  100.65,38.75 180 top
R52  10k  [R0402]  31.7,40.67 180 bottom
R53  4.7k  [R0402]  126.72,72.65 0 bottom
R54  100  [R0402]  126.72,73.64 180 bottom
R55  100  [R0402]  126.72,69.53 180 bottom
R56  100  [R0402]  126.72,71.57 180 bottom
R57  100  [R0402]  126.72,70.55 180 bottom
R58  100  [R0402]  136.06,37.85 270 top
R59  332k0.1%  [R0603]  17,82.1 90 top
R60  20k0.1%  [R0402]  12.75,64.65 180 bottom
R61  100  [R0402]  134.95,37.85 270 top
R62  10k  [R0402]  152.45,40.05 0 bottom
R63  10k  [R0402]  145.7,41.89 180 bottom
R64  0  [R0402]  129.31,27.55 180 bottom
R65  100  [R0402]  131.81,20.99 90 bottom
R66  100  [R0402]  130.48,20.99 90 bottom
R67  10k  [R0402]  145.7,40.67 180 bottom
R68  332k0.1%  [R0603]  131,82.1 90 top
R69  20k0.1%  [R0402]  126.75,64.65 180 bottom
R70  1k  [R0402]  147.45,45.3 180 top
R71  1k  [R0402]  147.45,43.8 180 top
R72  3.3k  [R0603]  138.65,38.75 180 top
R73  4.7k  [R0402]  164.72,72.65 0 bottom
R74  100  [R0402]  164.72,73.64 180 bottom
R75  100  [R0402]  164.72,69.53 180 bottom
R76  100  [R0402]  164.72,71.57 180 bottom
R77  100  [R0402]  164.72,70.55 180 bottom
R78  100  [R0402]  174.06,37.85 270 top
R79  100  [R0402]  172.95,37.85 270 top
R80  10k  [R0402]  190.45,40.05 0 bottom
R81  10k  [R0402]  183.7,41.89 180 bottom
R82  0  [R0402]  167.31,27.55 180 bottom
R83  100  [R0402]  169.81,20.99 90 bottom
R84  100  [R0402]  168.48,20.99 90 bottom
R85  10k  [R0402]  183.7,40.67 180 bottom
R86  332k0.1%  [R0603]  169,82.1 90 top
R87  20k0.1%  [R0402]  164.75,64.65 180 bottom
R88  1k  [R0402]  185.45,45.3 180 top
R89  1k  [R0402]  185.45,43.8 180 top
R90  3.3k  [R0603]  176.65,38.75 180 top
RBG1  3.3k  [R0402]  28.25,44.45 0 bottom
RBG2  3.3k  [R0402]  28.25,48.2 0 bottom
RBG3  3.3k  [R0402]  28.25,51.95 0 bottom
RBG4  3.3k  [R0402]  28.25,55.7 0 bottom
RBG5  3.3k  [R0402]  28.25,59.45 0 bottom
RBG6  3.3k  [R0402]  28.25,63.2 0 bottom
RBG7  3.3k  [R0402]  28.25,66.95 0 bottom
RBG8  3.3k  [R0402]  28.25,70.7 0 bottom
RBG9  3.3k  [R0402]  28.25,74.45 0 bottom
RBG10  3.3k  [R0402]  28.25,78.2 0 bottom
RBG11  3.3k  [R0402]  28.25,81.65 0 bottom
RBG12  3.3k  [R0402]  27.8,83.15 0 bottom
RBG13  3.3k  [R0402]  66.25,44.45 0 bottom
RBG14  3.3k  [R0402]  66.25,48.2 0 bottom
RBG15  3.3k  [R0402]  66.25,51.95 0 bottom
RBG16  3.3k  [R0402]  66.25,55.7 0 bottom
RBG17  3.3k  [R0402]  66.25,59.45 0 bottom
RBG18  3.3k  [R0402]  66.25,63.2 0 bottom
RBG19  3.3k  [R0402]  66.25,66.95 0 bottom
RBG20  3.3k  [R0402]  66.25,70.7 0 bottom
RBG21  3.3k  [R0402]  66.25,74.45 0 bottom
RBG22  3.3k  [R0402]  66.25,78.2 0 bottom
RBG23  3.3k  [R0402]  66.25,81.65 0 bottom
RBG24  3.3k  [R0402]  65.8,83.15 0 bottom
RBG25  3.3k  [R0402]  104.25,44.45 0 bottom
RBG26  3.3k  [R0402]  104.25,48.2 0 bottom
RBG27  3.3k  [R0402]  104.25,51.95 0 bottom
RBG28  3.3k  [R0402]  104.25,55.7 0 bottom
RBG29  3.3k  [R0402]  104.25,59.45 0 bottom
RBG30  3.3k  [R0402]  104.25,63.2 0 bottom
RBG31  3.3k  [R0402]  104.25,66.95 0 bottom
RBG32  3.3k  [R0402]  104.25,70.7 0 bottom
RBG33  3.3k  [R0402]  104.25,74.45 0 bottom
RBG34  3.3k  [R0402]  104.25,78.2 0 bottom
RBG35  3.3k  [R0402]  104.25,81.65 0 bottom
RBG36  3.3k  [R0402]  103.8,83.15 0 bottom
RBG37  3.3k  [R0402]  142.25,44.45 0 bottom
RBG38  3.3k  [R0402]  142.25,48.2 0 bottom
RBG39  3.3k  [R0402]  142.25,51.95 0 bottom
RBG40  3.3k  [R0402]  142.25,55.7 0 bottom
RBG41  3.3k  [R0402]  142.25,59.45 0 bottom
RBG42  3.3k  [R0402]  142.25,63.2 0 bottom
RBG43  3.3k  [R0402]  142.25,66.95 0 bottom
RBG44  3.3k  [R0402]  142.25,70.7 0 bottom
RBG45  3.3k  [R0402]  142.25,74.45 0 bottom
RBG46  3.3k  [R0402]  142.25,78.2 0 bottom
RBG47  3.3k  [R0402]  142.25,81.65 0 bottom
RBG48  3.3k  [R0402]  141.8,83.15 0 bottom
RBG49  3.3k  [R0402]  180.25,44.45 0 bottom
RBG50  3.3k  [R0402]  180.25,48.2 0 bottom
RBG51  3.3k  [R0402]  180.25,51.95 0 bottom
RBG52  3.3k  [R0402]  180.25,55.7 0 bottom
RBG53  3.3k  [R0402]  180.25,59.45 0 bottom
RBG54  3.3k  [R0402]  180.25,63.2 0 bottom
RBG55  3.3k  [R0402]  180.25,66.95 0 bottom
RBG56  3.3k  [R0402]  180.25,70.7 0 bottom
RBG57  3.3k  [R0402]  180.25,74.45 0 bottom
RBG58  3.3k  [R0402]  180.25,78.2 0 bottom
RBG59  3.3k  [R0402]  180.25,81.65 0 bottom
RBG60  3.3k  [R0402]  179.8,83.15 0 bottom
RCM1  100  [R0402]  28.4,45.45 0 top
RCM2  100  [R0402]  28.4,49.2 0 top
RCM3  100  [R0402]  28.4,52.95 0 top
RCM4  100  [R0402]  28.4,56.7 0 top
RCM5  100  [R0402]  28.4,60.45 0 top
RCM6  100  [R0402]  28.4,64.2 0 top
RCM7  100  [R0402]  28.4,67.95 0 top
RCM8  100  [R0402]  28.4,71.7 0 top
RCM9  100  [R0402]  28.4,75.45 0 top
RCM10  100  [R0402]  28.4,79.25 0 top
RCM11  100  [R0402]  28.4,83 0 top
RCM12  100  [R0402]  32,80.42 180 top
RCM13  100  [R0402]  66.4,45.45 0 top
RCM14  100  [R0402]  66.4,49.2 0 top
RCM15  100  [R0402]  66.4,52.95 0 top
RCM16  100  [R0402]  66.4,56.7 0 top
RCM17  100  [R0402]  66.4,60.45 0 top
RCM18  100  [R0402]  66.4,64.2 0 top
RCM19  100  [R0402]  66.4,67.95 0 top
RCM20  100  [R0402]  66.4,71.7 0 top
RCM21  100  [R0402]  66.4,75.45 0 top
RCM22  100  [R0402]  66.4,79.25 0 top
RCM23  100  [R0402]  66.4,83 0 top
RCM24  100  [R0402]  70,80.42 180 top
RCM25  100  [R0402]  104.4,45.45 0 top
RCM26  100  [R0402]  104.4,49.2 0 top
RCM27  100  [R0402]  104.4,52.95 0 top
RCM28  100  [R0402]  104.4,56.7 0 top
RCM29  100  [R0402]  104.4,60.45 0 top
RCM30  100  [R0402]  104.4,64.2 0 top
RCM31  100  [R0402]  104.4,67.95 0 top
RCM32  100  [R0402]  104.4,71.7 0 top
RCM33  100  [R0402]  104.4,75.45 0 top
RCM34  100  [R0402]  104.4,79.25 0 top
RCM35  100  [R0402]  104.4,83 0 top
RCM36  100  [R0402]  108,80.42 180 top
RCM37  100  [R0402]  142.4,45.45 0 top
RCM38  100  [R0402]  142.4,49.2 0 top
RCM39  100  [R0402]  142.4,52.95 0 top
RCM40  100  [R0402]  142.4,56.7 0 top
RCM41  100  [R0402]  142.4,60.45 0 top
RCM42  100  [R0402]  142.4,64.2 0 top
RCM43  100  [R0402]  142.4,67.95 0 top
RCM44  100  [R0402]  142.4,71.7 0 top
RCM45  100  [R0402]  142.4,75.45 0 top
RCM46  100  [R0402]  142.4,79.25 0 top
RCM47  100  [R0402]  142.4,83 0 top
RCM48  100  [R0402]  146,80.42 180 top
RCM49  100  [R0402]  180.4,45.45 0 top
RCM50  100  [R0402]  180.4,49.2 0 top
RCM51  100  [R0402]  180.4,52.95 0 top
RCM52  100  [R0402]  180.4,56.7 0 top
RCM53  100  [R0402]  180.4,60.45 0 top
RCM54  100  [R0402]  180.4,64.2 0 top
RCM55  100  [R0402]  180.4,67.95 0 top
RCM56  100  [R0402]  180.4,71.7 0 top
RCM57  100  [R0402]  180.4,75.45 0 top
RCM58  100  [R0402]  180.4,79.25 0 top
RCM59  100  [R0402]  180.4,83 0 top
RCM60  100  [R0402]  184,80.42 180 top
REG5_C1  1u,25V,X7R  [C0805]  37.4,19.52 0 top
REG5_C2  100n,>=25V,>=X5R  [C0402]  31.4,20.1 90 bottom
REG5_C3  10u,10V,X7R  [C0805]  37.4,22.05 0 top
REG5_C4  1u,25V,X7R  [C0805]  30.05,27.15 180 top
REG5_C5  10u,10V,X7R  [C0805]  37.4,24.4 0 top
REG5_C6  1u,25V,X7R  [C0805]  75.4,19.52 0 top
REG5_C7  100n,>=25V,>=X5R  [C0402]  69.4,20.1 90 bottom
REG5_C8  10u,10V,X7R  [C0805]  75.4,22.05 0 top
REG5_C9  1u,25V,X7R  [C0805]  68.05,27.15 180 top
REG5_C10  10u,10V,X7R  [C0805]  75.4,24.4 0 top
REG5_C11  1u,25V,X7R  [C0805]  113.4,19.52 0 top
REG5_C12  100n,>=25V,>=X5R  [C0402]  107.4,20.1 90 bottom
REG5_C13  10u,10V,X7R  [C0805]  113.4,22.05 0 top
REG5_C14  1u,25V,X7R  [C0805]  106.05,27.15 180 top
REG5_C15  10u,10V,X7R  [C0805]  113.4,24.4 0 top
REG5_C16  1u,25V,X7R  [C0805]  151.4,19.52 0 top
REG5_C17  100n,>=25V,>=X5R  [C0402]  145.4,20.1 90 bottom
REG5_C18  10u,10V,X7R  [C0805]  151.4,22.05 0 top
REG5_C19  1u,25V,X7R  [C0805]  144.05,27.15 180 top
REG5_C20  10u,10V,X7R  [C0805]  151.4,24.4 0 top
REG5_C21  1u,25V,X7R  [C0805]  189.4,19.52 0 top
REG5_C22  100n,>=25V,>=X5R  [C0402]  183.4,20.1 90 bottom
REG5_C23  10u,10V,X7R  [C0805]  189.4,22.05 0 top
REG5_C24  1u,25V,X7R  [C0805]  182.05,27.15 180 top
REG5_C25  10u,10V,X7R  [C0805]  189.4,24.4 0 top
REG5_D1  1PS79SB40  [SOD523]  33.73,20.45 180 bottom
REG5_D2  PMEG6010CEH  [SOD123]  34.9,26.85 0 top
REG5_D3  1PS79SB40  [SOD523]  71.72,20.45 180 bottom
REG5_D4  PMEG6010CEH  [SOD123]  72.9,26.85 0 top
REG5_D5  1PS79SB40  [SOD523]  109.72,20.45 180 bottom
REG5_D6  PMEG6010CEH  [SOD123]  110.9,26.85 0 top
REG5_D7  1PS79SB40  [SOD523]  147.72,20.45 180 bottom
REG5_D8  PMEG6010CEH  [SOD123]  148.9,26.85 0 top
REG5_D9  1PS79SB40  [SOD523]  185.72,20.45 180 bottom
REG5_D10  PMEG6010CEH  [SOD123]  186.9,26.85 0 top
REG5_L  744025100  [WE-TPC_2828]  33.45,23.65 90 top
REG5_L1  744025100  [WE-TPC_2828]  71.45,23.65 90 top
REG5_L2  744025100  [WE-TPC_2828]  109.45,23.65 90 top
REG5_L3  744025100  [WE-TPC_2828]  147.45,23.65 90 top
REG5_L4  744025100  [WE-TPC_2828]  185.45,23.65 90 top
REG5_R1  10k  [R0402]  34.55,17.1 180 bottom
REG5_R2  30.1k  [R0402]  35.7,19.6 90 bottom
REG5_R3  10k  [R0402]  72.55,17.1 180 bottom
REG5_R4  30.1k  [R0402]  73.7,19.6 90 bottom
REG5_R5  10k  [R0402]  110.55,17.1 180 bottom
REG5_R6  30.1k  [R0402]  111.7,19.6 90 bottom
REG5_R7  10k  [R0402]  148.55,17.1 180 bottom
REG5_R8  30.1k  [R0402]  149.7,19.6 90 bottom
REG5_R9  10k  [R0402]  186.55,17.1 180 bottom
REG5_R10  30.1k  [R0402]  187.7,19.6 90 bottom
RGQ1_1  1M,50V  [R0603]  21.89,82.07 0 bottom
RGQ1_2  100k,50V  [R0603]  17.82,83.11 90 bottom
RGQ1_3  1M  [R0402]  17.05,75.83 180 bottom
RGQ1_4  1M,50V  [R0603]  59.89,82.07 0 bottom
RGQ1_5  100k,50V  [R0603]  55.82,83.11 90 bottom
RGQ1_6  1M  [R0402]  55.05,75.83 180 bottom
RGQ1_7  1M,50V  [R0603]  97.89,82.07 0 bottom
RGQ1_8  100k,50V  [R0603]  93.82,83.11 90 bottom
RGQ1_9  1M  [R0402]  93.05,75.83 180 bottom
RGQ1_10  1M,50V  [R0603]  135.89,82.07 0 bottom
RGQ1_11  100k,50V  [R0603]  131.82,83.11 90 bottom
RGQ1_12  1M  [R0402]  131.05,75.83 180 bottom
RGQ1_13  1M,50V  [R0603]  173.89,82.07 0 bottom
RGQ1_14  100k,50V  [R0603]  169.82,83.11 90 bottom
RGQ1_15  1M  [R0402]  169.05,75.83 180 bottom
RP1  22  [MINI_MELF-0207R]  23.9,41.25 180 top
RP2  22  [MINI_MELF-0207R]  23.9,45 0 top
RP3  22  [MINI_MELF-0207R]  23.9,48.75 180 top
RP4  22  [MINI_MELF-0207R]  23.9,52.5 0 top
RP5  22  [MINI_MELF-0207R]  23.9,56.25 180 top
RP6  22  [MINI_MELF-0207R]  23.9,60 0 top
RP7  22  [MINI_MELF-0207R]  23.9,63.75 180 top
RP8  22  [MINI_MELF-0207R]  23.9,67.5 0 top
RP9  22  [MINI_MELF-0207R]  23.9,71.25 180 top
RP10  22  [MINI_MELF-0207R]  23.9,75 0 top
RP11  22  [MINI_MELF-0207R]  23.9,78.75 180 top
RP12  22  [MINI_MELF-0207R]  23.9,82.5 0 top
RP13  22  [MINI_MELF-0207R]  61.9,41.25 180 top
RP14  22  [MINI_MELF-0207R]  61.9,45 0 top
RP15  22  [MINI_MELF-0207R]  61.9,48.75 180 top
RP16  22  [MINI_MELF-0207R]  61.9,52.5 0 top
RP17  22  [MINI_MELF-0207R]  61.9,56.25 180 top
RP18  22  [MINI_MELF-0207R]  61.9,60 0 top
RP19  22  [MINI_MELF-0207R]  61.9,63.75 180 top
RP20  22  [MINI_MELF-0207R]  61.9,67.5 0 top
RP21  22  [MINI_MELF-0207R]  61.9,71.25 180 top
RP22  22  [MINI_MELF-0207R]  61.9,75 0 top
RP23  22  [MINI_MELF-0207R]  61.9,78.75 180 top
RP24  22  [MINI_MELF-0207R]  61.9,82.5 0 top
RP25  22  [MINI_MELF-0207R]  99.9,41.25 180 top
RP26  22  [MINI_MELF-0207R]  99.9,45 0 top
RP27  22  [MINI_MELF-0207R]  99.9,48.75 180 top
RP28  22  [MINI_MELF-0207R]  99.9,52.5 0 top
RP29  22  [MINI_MELF-0207R]  99.9,56.25 180 top
RP30  22  [MINI_MELF-0207R]  99.9,60 0 top
RP31  22  [MINI_MELF-0207R]  99.9,63.75 180 top
RP32  22  [MINI_MELF-0207R]  99.9,67.5 0 top
RP33  22  [MINI_MELF-0207R]  99.9,71.25 180 top
RP34  22  [MINI_MELF-0207R]  99.9,75 0 top
RP35  22  [MINI_MELF-0207R]  99.9,78.75 180 top
RP36  22  [MINI_MELF-0207R]  99.9,82.5 0 top
RP37  22  [MINI_MELF-0207R]  137.9,41.25 180 top
RP38  22  [MINI_MELF-0207R]  137.9,45 0 top
RP39  22  [MINI_MELF-0207R]  137.9,48.75 180 top
RP40  22  [MINI_MELF-0207R]  137.9,52.5 0 top
RP41  22  [MINI_MELF-0207R]  137.9,56.25 180 top
RP42  22  [MINI_MELF-0207R]  137.9,60 0 top
RP43  22  [MINI_MELF-0207R]  137.9,63.75 180 top
RP44  22  [MINI_MELF-0207R]  137.9,67.5 0 top
RP45  22  [MINI_MELF-0207R]  137.9,71.25 180 top
RP46  22  [MINI_MELF-0207R]  137.9,75 0 top
RP47  22  [MINI_MELF-0207R]  137.9,78.75 180 top
RP48  22  [MINI_MELF-0207R]  137.9,82.5 0 top
RP49  22  [MINI_MELF-0207R]  175.9,41.25 180 top
RP50  22  [MINI_MELF-0207R]  175.9,45 0 top
RP51  22  [MINI_MELF-0207R]  175.9,48.75 180 top
RP52  22  [MINI_MELF-0207R]  175.9,52.5 0 top
RP53  22  [MINI_MELF-0207R]  175.9,56.25 180 top
RP54  22  [MINI_MELF-0207R]  175.9,60 0 top
RP55  22  [MINI_MELF-0207R]  175.9,63.75 180 top
RP56  22  [MINI_MELF-0207R]  175.9,67.5 0 top
RP57  22  [MINI_MELF-0207R]  175.9,71.25 180 top
RP58  22  [MINI_MELF-0207R]  175.9,75 0 top
RP59  22  [MINI_MELF-0207R]  175.9,78.75 180 top
RP60  22  [MINI_MELF-0207R]  175.9,82.5 0 top
RV1  24V  [R0805]  22.75,24.85 0 bottom
RV2  24V  [R0603]  17.95,14.65 0 bottom
RV3  24V  [R0603]  17.95,16.3 0 bottom
RV4  24V  [R0805]  60.75,24.85 0 bottom
RV5  24V  [R0603]  55.95,14.65 0 bottom
RV6  24V  [R0603]  55.95,16.3 0 bottom
RV7  24V  [R0805]  98.75,24.85 0 bottom
RV8  24V  [R0603]  93.95,14.65 0 bottom
RV9  24V  [R0603]  93.95,16.3 0 bottom
RV10  24V  [R0805]  136.75,24.85 0 bottom
RV11  24V  [R0603]  131.95,14.65 0 bottom
RV12  24V  [R0603]  131.95,16.3 0 bottom
RV13  24V  [R0805]  174.75,24.85 0 bottom
RV14  24V  [R0603]  169.95,14.65 0 bottom
RV15  24V  [R0603]  169.95,16.3 0 bottom
U$1  ADUM5201  [SO16WB]  59.35,30.7 90 top
U$2  ADUM5201  [SO16WB]  21.35,30.7 90 top
U$3  [SMLOGOS_BSILK]  34.6,62.8 90 top
U$4  [SMLOGOS_BSILK]  72.6,62.8 90 top
U$5  ADUM5201  [SO16WB]  97.35,30.7 90 top
U$6  [SMLOGOS_BSILK]  110.6,62.8 90 top
U$7  ADUM5201  [SO16WB]  135.35,30.7 90 top
U$8  [SMLOGOS_BSILK]  148.6,62.8 90 top
U$9  ADUM5201  [SO16WB]  173.35,30.7 90 top
U$10  [SMLOGOS_BSILK]  186.6,62.8 90 top
V+R  100  [R0603]  34.23,72.24 180 bottom
V+R1  100  [R0603]  72.23,72.24 180 bottom
V+R2  100  [R0603]  110.23,72.24 180 bottom
V+R3  100  [R0603]  148.23,72.24 180 bottom
V+R4  100  [R0603]  186.23,72.24 180 bottom
V-R  100  [R0603]  33.88,52.02 0 top
V-R1  100  [R0603]  71.88,52.02 0 top
V-R2  100  [R0603]  109.88,52.02 0 top
V-R3  100  [R0603]  147.88,52.02 0 top
V-R4  100  [R0603]  185.88,52.02 0 top
X1  [43650-0509]  11.98,47.15 270 top
X2  [43650-0509]  49.98,47.15 270 top
X3  [43650-0709]  38.02,65.7 90 top
X4  [43650-0709]  76.02,65.7 90 top
X5  [43650-0609]  49.98,67.85 270 top
X6  [43650-0609]  11.98,67.85 270 top
X7  [43045-0800]  23.95,14.6 0 top
X8  [43045-0800]  61.95,14.6 0 top
X9  [43650-0509]  87.98,47.15 270 top
X10  [43650-0709]  114.02,65.7 90 top
X11  [43650-0609]  87.98,67.85 270 top
X12  [43045-0800]  99.95,14.6 0 top
X13  [43650-0509]  125.98,47.15 270 top
X14  [43650-0709]  152.02,65.7 90 top
X15  [43650-0609]  125.98,67.85 270 top
X16  [43045-0800]  137.95,14.6 0 top
X17  [43650-0509]  163.98,47.15 270 top
X18  [43650-0709]  190.02,65.7 90 top
X19  [43650-0609]  163.98,67.85 270 top
X20  [43045-0800]  175.95,14.6 0 top
Y1  12Mhz  [MT]  37.4,34.47 0 bottom
Y2  12Mhz  [MT]  75.4,34.47 0 bottom
Y3  12Mhz  [MT]  113.4,34.47 0 bottom
Y4  12Mhz  [MT]  151.4,34.47 0 bottom
Y5  12Mhz  [MT]  189.4,34.47 0 bottom

## Library data of the parts
C1-C65 CCM1-CCM60 CVREF CVREF1-CVREF4 CVREG CVREG1-CVREG4 D1-D10 DCM1-DCM60 DT1-DT30 IC1 IC3 IC4 IC8 IC9 IC12 IC13 IC16 IC17 IC20 J1-J5 LED1-LED10 NTC_C1-NTC_C20 NTC_R1-NTC_R20 Q1-Q10 QB1-QB60 R1-R90 RBG1-RBG60 RCM1-RCM60 REG5_C1-REG5_C25 REG5_D1 REG5_D3 REG5_D5 REG5_D7 REG5_D9 REG5_R1-REG5_R10 RGQ1_1-RGQ1_15 RP1-RP60 RV1-RV15 U$1 U$2 U$5 U$7 U$9 V+R V+R1-V+R4 V-R V-R1-V-R4 Y1-Y5 = phrenetic
FID1-FID35 = microbuilder
IC2 IC5-IC7 IC10 IC11 IC14 IC15 IC18 IC19 = bms-hsrm
JP1-JP5 = pinhead
L1-L15 REG5_L REG5_L1-REG5_L4 = EagleLibrary_Wuerth_Elektronik_eiSos_Version_6
REG5_D2 REG5_D4 REG5_D6 REG5_D8 REG5_D10 = semicon-smd-ipc
U$3 U$4 U$6 U$8 U$10 = spr-logo
X1-X20 = con-molex-micro-fit-3_0